# EAGLE board threshold_control_device (EAGLE 5.11)
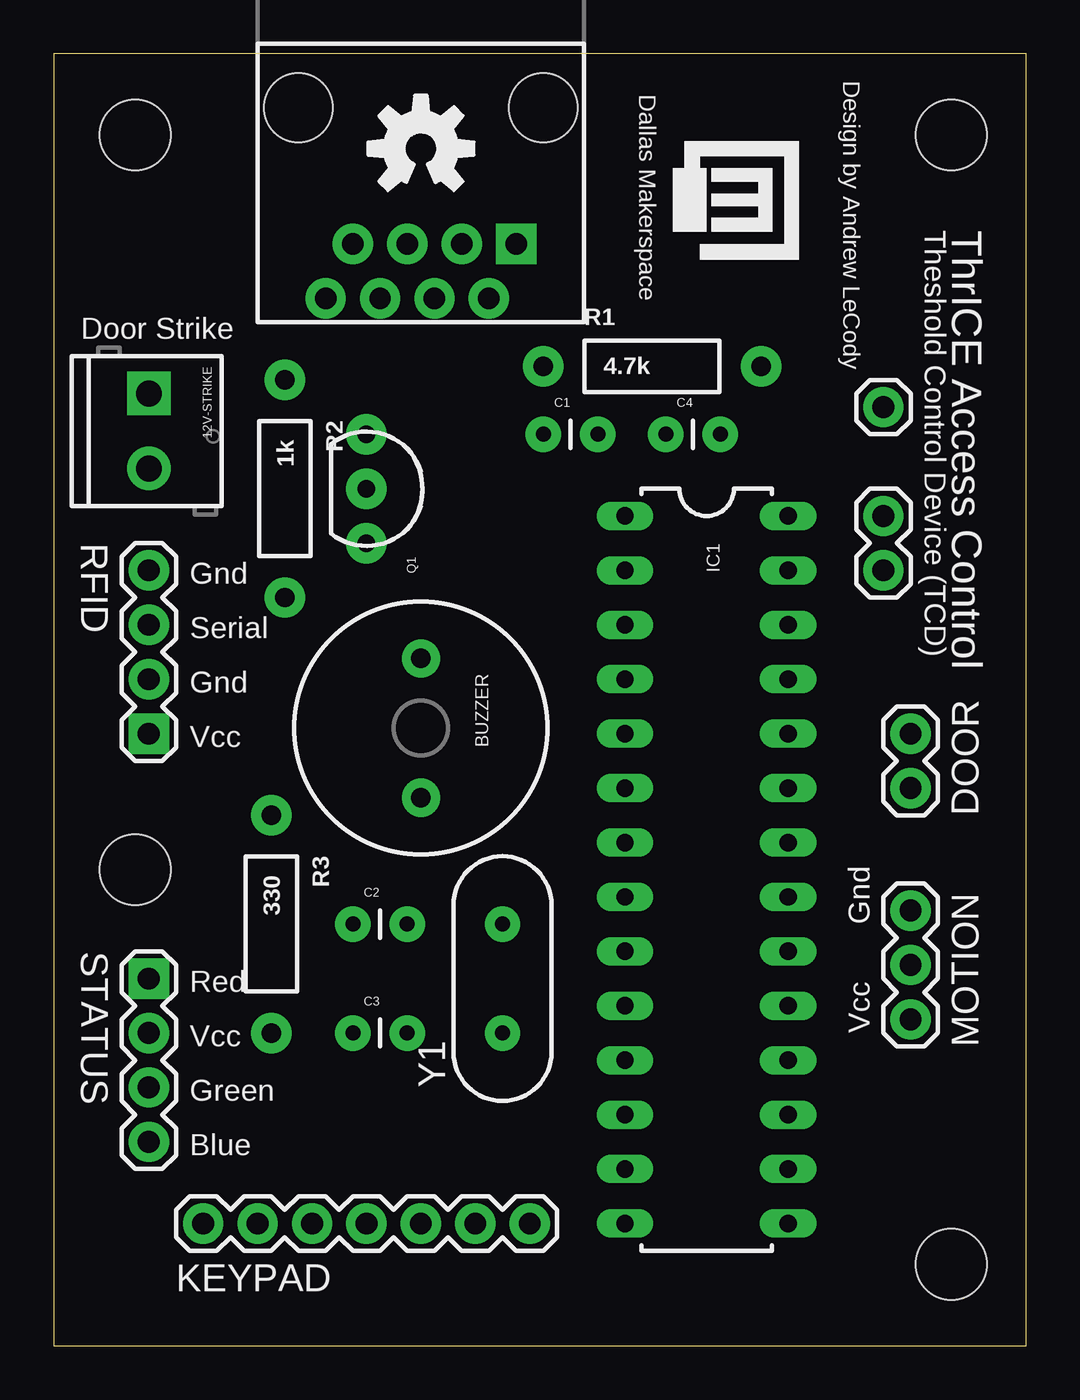
[diagram p0: board, top side]
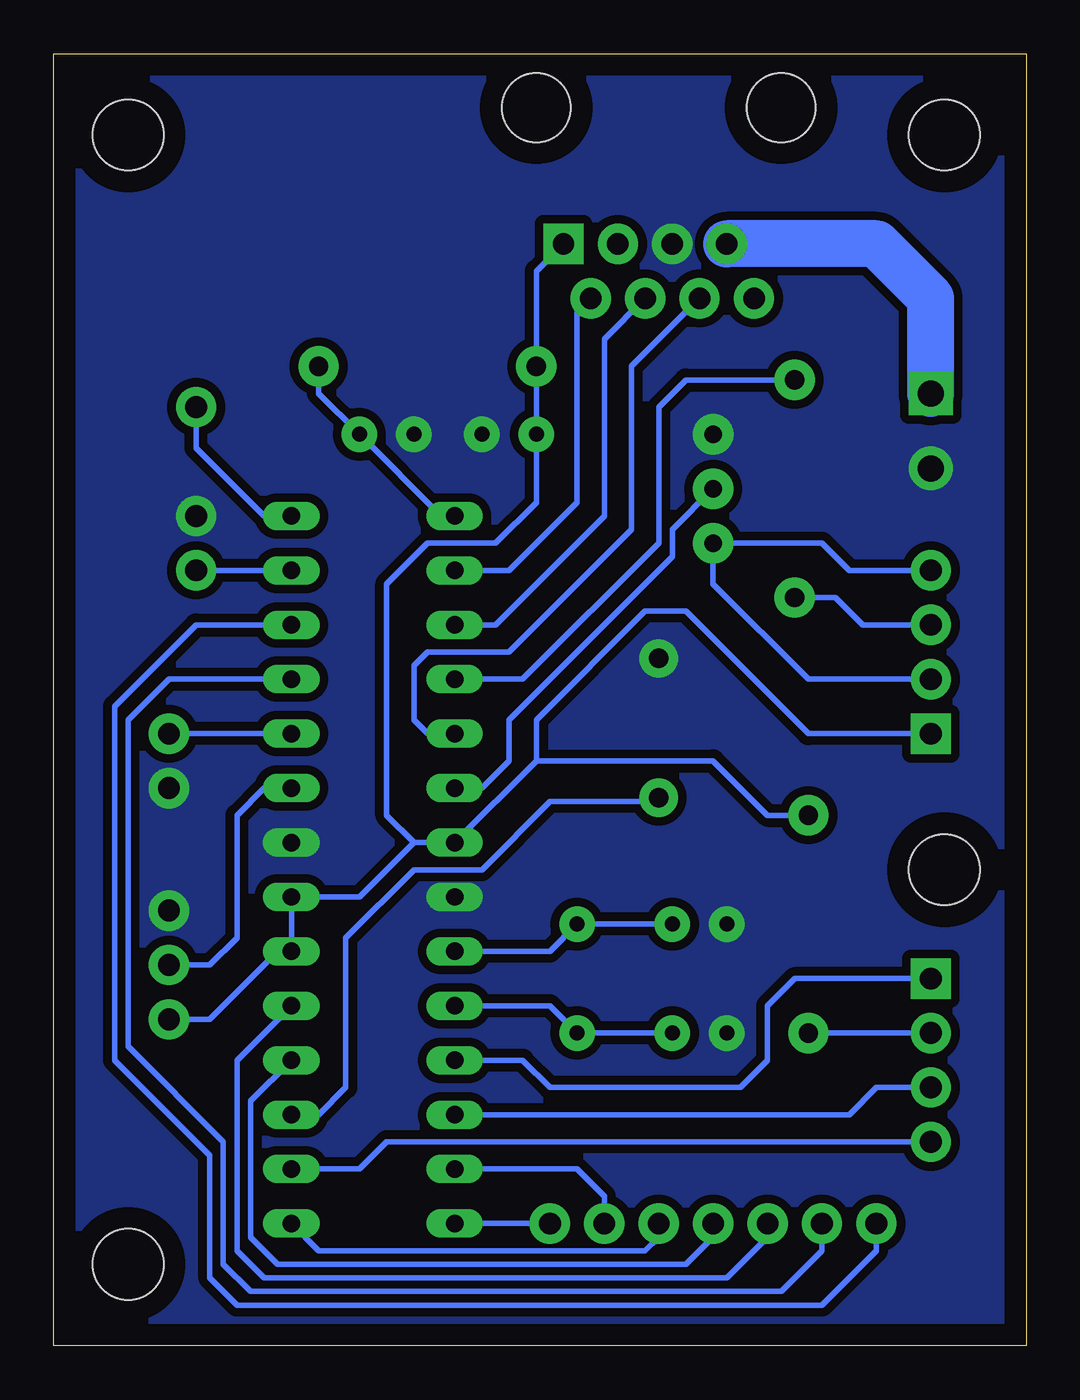
[diagram p1: board, bottom side, seen from below]

Size 45.39 x 60.31 mm. Coordinates in mm from the lower left corner, seen from the top.
Outline: 0,0 45.39,0 45.39,60.31 0,60.31 0,0
Copper layers (1*16): Top 0.035mm / dielectric 1.5mm / Bottom 0.035mm
Design rules "default": minimum track width 10mil, minimum drill 24mil, track to track 8mil, track to pad 8mil, pad to pad 8mil, via to via 8mil, smd to smd 8mil, copper to edge 40mil, drill to drill 8mil, minimum pad ring 10mil, minimum via ring 8mil, stop-mask expansion 4mil, vias tented up to drill 0mil, thermal gap 10mil

## Footprints (pad centres in the part's own frame; a part is rotated, then mirrored left to right if it is on the bottom)
SCREWTERMINAL-3.5MM-2 = drill 1.2 pad 2.032 square: 1 0,0 | drill 1.2 pad 2.032 round: 2 3.5,0
BUZZER-12MM = drill 0.9 pad 1.778 round: + 3.25,0; - -3.25,0
CAP-PTH-SMALL = drill 0.7 pad 1.651 round: 1 0,0; 2 2.54,0
1X02 = drill 1.016 pad 1.88 round: 1 0,0; 2 2.54,0
DIL28-3 = drill 0.813 long: 1 -16.51,-3.81; 2 -13.97,-3.81; 3 -11.43,-3.81; 4 -8.89,-3.81; 5 -6.35,-3.81; 6 -3.81,-3.81; 7 -1.27,-3.81; 8 1.27,-3.81; 9 3.81,-3.81; 10 6.35,-3.81; 11 8.89,-3.81; 12 11.43,-3.81; 13 13.97,-3.81; 14 16.51,-3.81; 15 16.51,3.81; 16 13.97,3.81; 17 11.43,3.81; 18 8.89,3.81; 19 6.35,3.81; 20 3.81,3.81; 21 1.27,3.81; 22 -1.27,3.81; 23 -3.81,3.81; 24 -6.35,3.81; 25 -8.89,3.81; 26 -11.43,3.81; 27 -13.97,3.81; 28 -16.51,3.81
1X07 = drill 1.016 pad 1.88 round: 1 0,0; 2 2.54,0; 3 5.08,0; 4 7.62,0; 5 10.16,0; 6 12.7,0; 7 15.24,0
1X03 = drill 1.016 pad 1.88 round: 1 0,0; 2 2.54,0; 3 5.08,0
TO-92-AMMO = drill 0.813 pad 1.88 round: 1 -2.54,0; 2 0,0; 3 2.54,0
AXIAL-0.4 = drill 0.9 pad 1.88 round: P$1 -5.08,0; P$2 5.08,0
1X04 = drill 1.016 pad 1.88 square: 1 0,0 | drill 1.016 pad 1.88 round: 2 2.54,0; 3 5.08,0; 4 7.62,0
1X01 = drill 1.016 pad 1.88 round: 1 0,0
RJ45-8 = drill 1 pad 1.88 square: 1 -4.445,6.35 | drill 1 pad 1.88 round: 2 -3.175,8.89; 3 -1.905,6.35; 4 -0.635,8.89; 5 0.635,6.35; 6 1.905,8.89; 7 3.175,6.35; 8 4.445,8.89 | hole 3.2: -5.715,0; 5.715,0
STAND-OFF = hole 3.302: 0,0
HC49US = drill 0.7 pad 1.651 round: 1 -2.54,0; 2 2.54,0

## Placement (x,y rotation side)
12V-STRIKE  [SCREWTERMINAL-3.5MM-2]  4.45,44.45 270 top
BUZZER  [BUZZER-12MM]  17.14,28.84 270 top
C1  100n  [CAP-PTH-SMALL]  22.86,42.55 0 top
C2  22pF  [CAP-PTH-SMALL]  13.97,19.68 0 top
C3  22pF  [CAP-PTH-SMALL]  13.97,14.61 0 top
C4  100n  [CAP-PTH-SMALL]  28.57,42.55 0 top
DOOR  [1X02]  40.01,26.04 90 top
E$1  [OSHW-LOGO-M]  17.14,55.88 0 top
IC1  AVR-MEGA8-PPTH  [DIL28-3]  30.48,22.23 270 top
KEYPAD  [1X07]  22.23,5.71 180 top
MOTION  [1X03]  40.01,20.32 270 top
Q1  2N3904  [TO-92-AMMO]  14.61,40.01 270 top
R1  4.7k  [AXIAL-0.4]  27.94,45.72 0 top
R2  1k  [AXIAL-0.4]  10.79,40.01 270 top
R3  330  [AXIAL-0.4]  10.16,19.68 270 top
RFID  [1X04]  4.45,28.57 90 top
SPARE-ANALOG  M01PTH  [1X01]  38.73,43.81 90 top
STATUS  [1X04]  4.45,17.14 270 top
TAMPER  [1X02]  38.73,36.2 90 top
TO-MCS  RJ45-8PTH  [RJ45-8]  17.14,57.78 180 top
U$1  [DMS-LOGO]  28.57,56.52 270 top
U$2  [STAND-OFF]  41.91,3.81 0 top
U$3  [STAND-OFF]  3.81,22.23 0 top
U$5  [STAND-OFF]  41.91,56.52 0 top
U$6  [STAND-OFF]  3.81,56.52 0 top
Y1  16Mhz  [HC49US]  20.95,17.14 90 top

## Library data of the parts
12V-STRIKE BUZZER C1-C4 DOOR E$1 IC1 KEYPAD MOTION Q1 R1-R3 RFID SPARE-ANALOG STATUS TAMPER TO-MCS U$2 U$3 U$5 U$6 Y1 = SparkFun
U$1 = DMS

## Nets
12V-STRIKE: 12V-STRIKE.1 TO-MCS.7
BLU: IC1.16 STATUS.4
BUZZER: BUZZER.+ IC1.17
DOOR-SENSOR: DOOR.2 IC1.24
GND: 12V-STRIKE.2 BUZZER.- C1.2 C2.1 C3.1 C4.1 DOOR.1 IC1.8 IC1.22 MOTION.1 Q1.1 TAMPER.2 TO-MCS.5
GRN: IC1.12 STATUS.3
KEYPAD6: IC1.25 KEYPAD.6
KEYPAD7: IC1.26 KEYPAD.7
MOTION-SENSOR: IC1.23 MOTION.2
N$1: C3.2 IC1.10 Y1.1
N$2: C2.2 IC1.9 Y1.2
N$3: IC1.19 KEYPAD.5
N$4: R3.P$2 STATUS.2
N$5: IC1.14 KEYPAD.1
N$7: IC1.18 KEYPAD.4
N$8: IC1.13 KEYPAD.2
N$10: IC1.4 R2.P$1
N$11: Q1.3 RFID.2 RFID.4
N$12: IC1.15 KEYPAD.3
N$13: IC1.28 SPARE-ANALOG.1
RED: IC1.11 STATUS.1
RESET: C4.2 IC1.1 R1.P$2
RFID-ENABLE: IC1.6 Q1.2
RFID-TX: R2.P$2 RFID.3
TAMPER: IC1.27 TAMPER.1
TCD-RX: IC1.2 TO-MCS.2
TCD-SELECT: IC1.5 TO-MCS.6
TCD-TX: IC1.3 TO-MCS.4
VCC: C1.1 IC1.7 IC1.20 IC1.21 MOTION.3 R1.P$1 R3.P$1 RFID.1 TO-MCS.1

## Tracks (layer width: path | path; a pad name or v marks a point on that pad's centre or on a via)
12V-STRIKE
  Bottom 2.184: TO-MCS.7 6.99,51.44 4.45,48.9 12V-STRIKE.1
BLU
  Bottom 0.254: STATUS.4 29.84,9.53 31.11,8.26 IC1.16
BUZZER
  Bottom 0.254: IC1.17 33.02,10.79 31.75,12.06 31.75,19.05 28.57,22.23 25.4,22.23 22.23,25.4 17.33,25.4 BUZZER.+
DOOR-SENSOR
  Bottom 0.254: IC1.24 DOOR.2
GND
  pour Bottom (isolate 0.406, no thermals): 0,0 0,60.33 45.72,60.33 45.72,0
GRN
  Bottom 0.254: STATUS.3 6.99,12.06 8.26,10.79 IC1.12
KEYPAD6
  Bottom 0.254: KEYPAD.6 9.53,4.45 11.43,2.54 36.2,2.54 37.47,3.81 37.47,9.53 41.91,13.97 41.91,29.21 40.01,31.11 IC1.25
KEYPAD7
  Bottom 0.254: KEYPAD.7 6.99,4.45 9.53,1.91 36.83,1.91 38.1,3.17 38.1,8.89 42.55,13.34 42.55,29.84 38.73,33.66 IC1.26
MOTION-SENSOR
  Bottom 0.254: IC1.23 35.56,26.04 36.83,24.77 36.83,19.05 38.1,17.78 MOTION.2
N$1
  Bottom 0.254: C3.2 Y1.1 22.23,15.88 IC1.10
N$2
  Bottom 0.254: C2.2 Y1.2 22.23,18.41 IC1.9
N$3
  Bottom 0.254: KEYPAD.5 12.06,5.08 13.97,3.17 35.56,3.17 36.83,4.45 36.83,13.34 IC1.19
N$4
  Bottom 0.254: STATUS.2 R3.P$2
N$5
  Bottom 0.254: KEYPAD.1 IC1.14
N$7
  Bottom 0.254: KEYPAD.4 14.61,5.08 15.88,3.81 34.92,3.81 36.2,5.08 36.2,11.43 IC1.18
N$8
  Bottom 0.254: KEYPAD.2 19.68,6.99 20.95,8.26 IC1.13
N$10
  Bottom 0.254: IC1.4 23.5,31.11 17.14,37.47 17.14,43.81 15.88,45.09 R2.P$1
N$11
  Bottom 0.254: RFID.4 8.26,36.2 9.53,37.47 Q1.3 14.61,35.56 10.16,31.11 RFID.2
N$12
  Bottom 0.254: KEYPAD.3 17.14,5.08 17.78,4.45 33.02,4.45 IC1.15
N$13
  Bottom 0.254: IC1.28 35.56,38.73 38.73,41.91 SPARE-ANALOG.1
RED
  Bottom 0.254: STATUS.1 10.79,17.14 12.06,15.88 12.06,13.34 13.34,12.06 22.23,12.06 23.5,13.34 IC1.11
RESET
  Bottom 0.254: IC1.1 27.3,38.73 C4.2 33.02,44.45 R1.P$2
RFID-ENABLE
  Bottom 0.254: IC1.6 25.4,26.04 24.13,27.3 24.13,29.21 16.51,36.83 16.51,38.1 Q1.2
RFID-TX
  Bottom 0.254: R2.P$2 8.89,34.92 7.62,33.66 RFID.3
TAMPER
  Bottom 0.254: IC1.27 TAMPER.1
TCD-RX
  Bottom 0.254: TO-MCS.2 20.95,48.26 20.95,39.37 24.13,36.2 IC1.2
TCD-SELECT
  Bottom 0.254: IC1.5 27.94,28.57 28.57,29.21 28.57,31.75 27.94,32.38 24.13,32.38 18.41,38.1 18.41,45.72 TO-MCS.6
TCD-TX
  Bottom 0.254: IC1.3 24.77,33.66 19.68,38.73 19.68,46.99 TO-MCS.4
VCC
  Bottom 0.254: 28.57,23.5 29.84,24.77 29.84,35.56 27.94,37.47 24.77,37.47 22.86,39.37 C1.1 R1.P$1 22.86,50.16 TO-MCS.1 | 28.57,23.5 IC1.7 22.86,27.3 | 28.57,23.5 31.11,20.95 IC1.21 IC1.20 34.92,18.41 38.1,15.24 MOTION.3 | 22.86,27.3 22.86,29.21 17.78,34.29 15.88,34.29 10.16,28.57 RFID.1 | R3.P$1 12.06,24.77 14.61,27.3 22.86,27.3

## Text on the board
tPlace: Design by Andrew LeCody | Dallas Makerspace | Theshold Control Device (TCD) | ThrICE Access Control | Door Strike | RFID | Gnd | Serial | Gnd | Vcc | DOOR | Gnd | STATUS | Red | Vcc | Vcc | MOTION | Green | Blue | KEYPAD
200bmp: /home/aceat64/Downloads/DMS_Logo_Black.bmp | /home/aceat64/Downloads/DMS_Logo_Black.bmp | /home/aceat64/Downloads/DMS_Logo_Black.bmp